# Altium PCB FPv1.3.5.PcbDoc (part 2 of 9)
Units mil, origin at the board's own origin, x right, y up, seen from the top; angles counter-clockwise.
Board outline 3200 x 2100 mil, 4 copper layers (Top Layer, GROUND PLANE, POWER PLANE, Bottom Layer); 98 components, 183 nets, 614 pads, 312 vias.
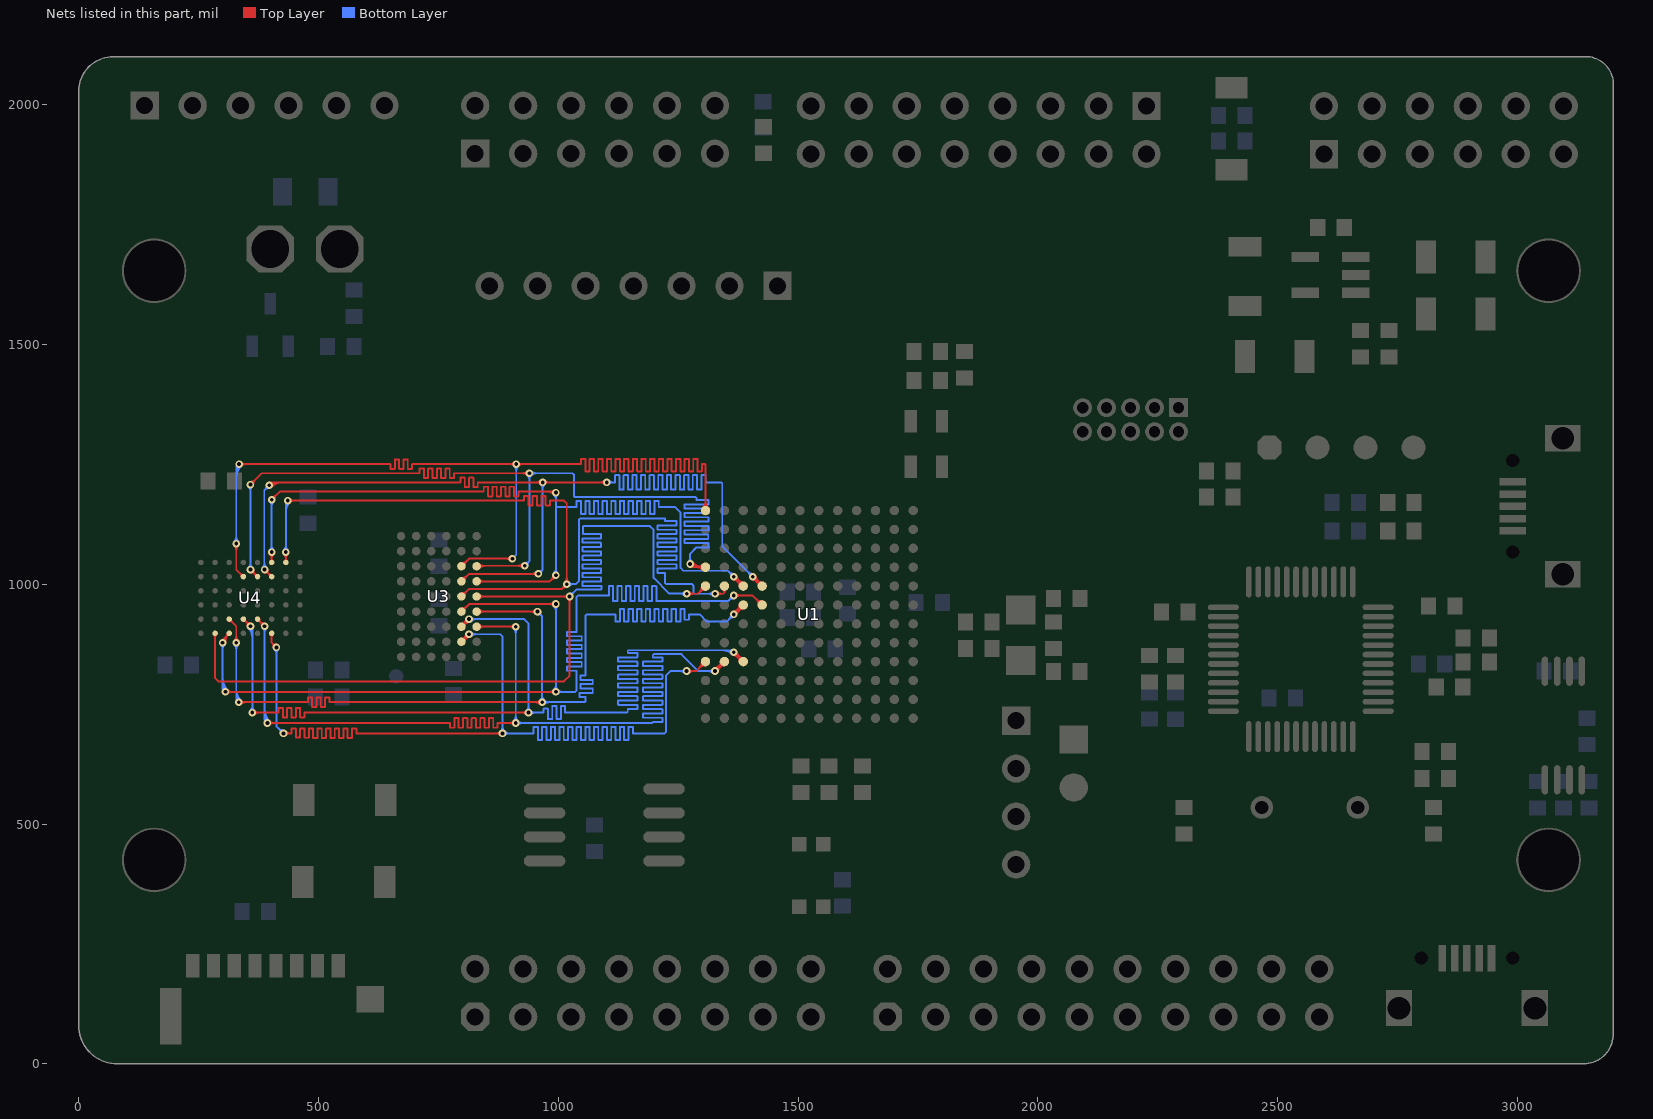
[diagram p4: the nets of this part, all layers, seen from the top]

## Via types
v1: diameter 15.87, hole 7.87, Top Layer to Bottom Layer, tented both sides, 261 vias
v2: diameter 19.8, hole 11.81, Top Layer to Bottom Layer, tented both sides, 25 vias
v3: diameter 23.62, hole 15.75, Top Layer to Bottom Layer, tented both sides, 11 vias
v4: diameter 20, hole 13, Top Layer to Bottom Layer, tented both sides, 5 vias
v5: diameter 27.68, hole 15.75, Top Layer to Bottom Layer, tented both sides, 3 vias
v6: diameter 23.74, hole 15.75, Top Layer to Bottom Layer, tented both sides, 2 vias
v7: diameter 19.8, hole 9.84, Top Layer to Bottom Layer, tented both sides, 2 vias
v8: diameter 23.62, hole 9.45, Top Layer to Bottom Layer, tented both sides, 1 vias
v9: diameter 17.24, hole 9.06, Top Layer to Bottom Layer, tented both sides, 1 vias
v10: diameter 23.74, hole 11.81, Top Layer to Bottom Layer, tented both sides, 1 vias

## Nets (pads, with @x,y where several pads share a name; then routed paths per layer and width w, separated by ;. In a path a pad name is that pad's centre, name@x,y a point inside that pad or via, vN(x,y) a via of type N, cw(c..) or ccw(c..) an arc to the next point about the centre after c; other vN are vias at no path point) (continued)
AD2: U1.A4 U3.H5 U4.C6 | length 2782.5
  Top Layer w4: U4.C6@399.94,895.02 cw(c393.61,888.68) 402.56,888.68 cw(c411.51,888.68) U4.C6@405.18,895.02 ; U4.C6@402.56,897.64 402.56,877.95 ; v1@406.45,868.25 ccw(c393.15,868.54) 402.56,877.95 ; v1@412.26,874.06 cw(c411.97,887.36) 402.56,877.95 ; v1(412.39,868.12) 402.56,877.95 ; v1(427.17,688.98) 443.12,688.98 ccw(c443.12,689.88) 444.02,689.88 444.02,698.08 cw(c444.92,698.08) 444.92,698.98 452.12,698.98 cw(c452.12,698.08) 453.02,698.08 453.02,681.48 ccw(c453.92,681.48) 453.92,680.58 461.12,680.58 ccw(c461.12,681.48) 462.02,681.48 462.02,698.08 cw(c462.92,698.08) 462.92,698.98 470.12,698.98 cw(c470.12,698.08) 471.02,698.08 471.02,680.72 ccw(c471.92,680.72) 471.92,679.82 479.12,679.82 ccw(c479.12,680.72) 480.02,680.72 480.02,698.08 cw(c480.92,698.08) 480.92,698.98 488.12,698.98 cw(c488.12,698.08) 489.02,698.08 489.02,679.88 ccw(c489.92,679.88) 489.92,678.98 497.12,678.98 ccw(c497.12,679.88) 498.02,679.88 498.02,698.08 cw(c498.92,698.08) 498.92,698.98 506.12,698.98 cw(c506.12,698.08) 507.02,698.08 507.02,679.88 ccw(c507.92,679.88) 507.92,678.98 515.12,678.98 ccw(c515.12,679.88) 516.02,679.88 516.02,698.08 cw(c516.92,698.08) 516.92,698.98 524.12,698.98 cw(c524.12,698.08) 525.02,698.08 525.02,679.88 ccw(c525.92,679.88) 525.92,678.98 533.12,678.98 ccw(c533.12,679.88) 534.02,679.88 534.02,698.08 cw(c534.92,698.08) 534.92,698.98 542.12,698.98 cw(c542.12,698.08) 543.02,698.08 543.02,679.88 ccw(c543.92,679.88) 543.92,678.98 551.12,678.98 ccw(c551.12,679.88) 552.02,679.88 552.02,698.08 cw(c552.92,698.08) 552.92,698.98 560.12,698.98 cw(c560.12,698.08) 561.02,698.08 561.02,679.88 ccw(c561.92,679.88) 561.92,678.98 569.12,678.98 ccw(c569.12,679.88) 570.02,679.88 570.02,698.08 cw(c570.92,698.08) 570.92,698.98 578.12,698.98 cw(c578.12,698.08) 579.02,698.08 579.02,689.88 ccw(c579.92,689.88) 579.92,688.98 v1(883.86,688.98) ; v1@431.36,684.78 cw(c441.5,674.64) 441.5,688.98 cw(c441.5,703.31) v1@431.36,693.17 ; U3.H5@798.23,879.92 v1(813.98,895.67) ; U3.H5@798.23,886.78 ccw(c798.23,903.34) 809.94,891.63 ccw(c821.64,879.92) U3.H5@805.09,879.92 ; U3.H5@801.77,886.92 ccw(c795.36,898.02) v1@808.09,896.41 ; U3.H5@805.22,883.47 cw(c816.33,877.05) v1@814.72,889.78 ; 805.39,889.01 cw(c810.04,880.97) v1@812.44,889.93 ; 807.31,887.09 ccw(c799.27,891.73) v1@808.24,894.13 ; v1@808.04,895.67 cw(c793.71,895.67) 803.84,885.53 cw(c813.98,875.4) v1@813.98,889.73 ; v1@879.66,684.78 ccw(c869.53,674.64) 869.53,688.98 ccw(c869.53,703.31) v1@879.66,693.17 ; v1(1267.72,818.9) 1287.4,818.9 U1.A4@1307.09,838.58 ; v1@1271.91,814.7 cw(c1282.04,804.57) 1282.04,818.9 cw(c1282.04,833.22) v1@1271.91,823.09 ; U1.A4@1299.24,838.58 cw(c1280.31,838.58) 1293.7,825.19 cw(c1307.09,811.81) U1.A4@1307.09,830.74
  Bottom Layer w4: v1@408.19,863.92 cw(c398.06,853.79) 412.39,853.79 cw(c426.72,853.79) v1@416.59,863.92 ; v1(412.39,868.12) 412.39,703.75 v1(427.17,688.98) ; v1@421.23,688.98 ccw(c406.9,688.98) 417.03,699.11 ccw(c427.17,709.25) v1@427.17,694.91 ; v1(813.98,895.67) 878.94,895.67 883.86,890.75 v1(883.86,688.98) 948.5,688.98 948.5,702.18 cw(c948.95,702.18) 948.95,702.63 957.05,702.63 cw(c957.05,702.18) 957.5,702.18 957.5,675.77 ccw(c957.95,675.77) 957.95,675.32 966.05,675.32 ccw(c966.05,675.77) 966.5,675.77 966.5,702.18 cw(c966.95,702.18) 966.95,702.63 975.05,702.63 cw(c975.05,702.18) 975.5,702.18 975.5,675.77 ccw(c975.95,675.77) 975.95,675.32 984.05,675.32 ccw(c984.05,675.77) 984.5,675.77 984.5,702.18 cw(c984.95,702.18) 984.95,702.63 993.05,702.63 cw(c993.05,702.18) 993.5,702.18 993.5,675.77 ccw(c993.95,675.77) 993.95,675.32 1002.05,675.32 ccw(c1002.05,675.77) 1002.5,675.77 1002.5,702.18 cw(c1002.95,702.18) 1002.95,702.63 1011.05,702.63 cw(c1011.05,702.18) 1011.5,702.18 1011.5,675.77 ccw(c1011.95,675.77) 1011.95,675.32 1020.05,675.32 ccw(c1020.05,675.77) 1020.5,675.77 1020.5,702.18 cw(c1020.95,702.18) 1020.95,702.63 1029.05,702.63 cw(c1029.05,702.18) 1029.5,702.18 1029.5,675.77 ccw(c1029.95,675.77) 1029.95,675.32 1038.05,675.32 ccw(c1038.05,675.77) 1038.5,675.77 1038.5,702.18 cw(c1038.95,702.18) 1038.95,702.63 1047.05,702.63 cw(c1047.05,702.18) 1047.5,702.18 1047.5,675.77 ccw(c1047.95,675.77) 1047.95,675.32 1056.05,675.32 ccw(c1056.05,675.77) 1056.5,675.77 1056.5,702.18 cw(c1056.95,702.18) 1056.95,702.63 1065.05,702.63 cw(c1065.05,702.18) 1065.5,702.18 1065.5,675.77 ccw(c1065.95,675.77) 1065.95,675.32 1074.05,675.32 ccw(c1074.05,675.77) 1074.5,675.77 1074.5,702.18 cw(c1074.95,702.18) 1074.95,702.63 1083.05,702.63 cw(c1083.05,702.18) 1083.5,702.18 1083.5,675.77 ccw(c1083.95,675.77) 1083.95,675.32 1092.05,675.32 ccw(c1092.05,675.77) 1092.5,675.77 1092.5,702.18 cw(c1092.95,702.18) 1092.95,702.63 1101.05,702.63 cw(c1101.05,702.18) 1101.5,702.18 1101.5,675.77 ccw(c1101.95,675.77) 1101.95,675.32 1110.05,675.32 ccw(c1110.05,675.77) 1110.5,675.77 1110.5,702.18 cw(c1110.95,702.18) 1110.95,702.63 1119.05,702.63 cw(c1119.05,702.18) 1119.5,702.18 1119.5,675.77 ccw(c1119.95,675.77) 1119.95,675.32 1128.05,675.32 ccw(c1128.05,675.77) 1128.5,675.77 1128.5,702.18 cw(c1128.95,702.18) 1128.95,702.63 1137.05,702.63 cw(c1137.05,702.18) 1137.5,702.18 1137.5,675.77 ccw(c1137.95,675.77) 1137.95,675.32 1146.05,675.32 ccw(c1146.05,675.77) 1146.5,675.77 1146.5,702.18 cw(c1146.95,702.18) 1146.95,702.63 1155.05,702.63 cw(c1155.05,702.18) 1155.5,702.18 1155.5,688.98 1222,688.98 1225,691.98 1225,810 1233.9,818.9 v1(1267.72,818.9) ; v1@818.17,891.47 cw(c828.31,881.34) 828.31,895.67 cw(c828.31,910) v1@818.17,899.87 ; v1@879.66,693.17 ccw(c869.53,703.31) 883.86,703.31 ccw(c898.19,703.31) 888.06,693.17 ccw(c898.19,703.31) 898.19,688.98 ccw(c898.19,674.64) v1@888.06,684.78 ; v1@1263.52,814.7 ccw(c1253.39,804.57) 1253.39,818.9 ccw(c1253.39,833.22) v1@1263.52,823.09
AD3: U1.B4 U3.G6 U4.D5 | length 2869
  Top Layer w4: U4.D5@373.03,923.46 cw(c373.03,914.5) 379.36,920.83 cw(c385.69,927.17) U4.D5@376.74,927.17 ; U4.D5@373.03,927.17 v1(387.8,912.4) ; v1@381.86,912.4 ccw(c367.52,912.4) 377.66,922.54 ccw(c387.8,932.67) v1@387.8,918.34 ; v1(393.7,710.63) 773.62,710.63 cw(c773.62,709.8) 774.45,709.8 774.45,701.53 ccw(c775.35,701.53) 775.35,700.63 782.55,700.63 ccw(c782.55,701.53) 783.45,701.53 783.45,719.73 cw(c784.35,719.73) 784.35,720.63 791.55,720.63 cw(c791.55,719.73) 792.45,719.73 792.45,701.53 ccw(c793.35,701.53) 793.35,700.63 800.55,700.63 ccw(c800.55,701.53) 801.45,701.53 801.45,719.73 cw(c802.35,719.73) 802.35,720.63 809.55,720.63 cw(c809.55,719.73) 810.45,719.73 810.45,701.53 ccw(c811.35,701.53) 811.35,700.63 818.55,700.63 ccw(c818.55,701.53) 819.45,701.53 819.45,719.73 cw(c820.35,719.73) 820.35,720.63 827.55,720.63 cw(c827.55,719.73) 828.45,719.73 828.45,701.53 ccw(c829.35,701.53) 829.35,700.63 836.55,700.63 ccw(c836.55,701.53) 837.45,701.53 837.45,719.73 cw(c838.35,719.73) 838.35,720.63 845.55,720.63 cw(c845.55,719.73) 846.45,719.73 846.45,701.53 ccw(c847.35,701.53) 847.35,700.63 854.55,700.63 ccw(c854.55,701.53) 855.45,701.53 855.45,719.73 cw(c856.35,719.73) 856.35,720.63 863.55,720.63 cw(c863.55,719.73) 864.45,719.73 864.45,701.53 ccw(c865.35,701.53) 865.35,700.63 872.55,700.63 ccw(c872.55,701.53) 873.45,701.53 873.45,709.73 cw(c874.35,709.73) 874.35,710.63 v1(911.42,710.63) ; v1@397.9,706.43 cw(c408.03,696.3) 408.03,710.63 cw(c408.03,724.96) v1@397.9,714.83 ; U3.G6@829.72,911.42 v1(911.42,911.42) ; U3.G6@834.57,906.57 cw(c846.28,894.86) 846.28,911.42 cw(c846.28,927.97) U3.G6@834.57,916.27 ; v1@907.22,706.43 ccw(c897.08,696.3) 897.08,710.63 ccw(c897.08,724.96) v1@907.22,714.83 ; v1@907.22,907.22 ccw(c897.08,897.08) 897.08,911.42 ccw(c897.08,925.75) v1@907.22,915.62 ; v1@1325.27,824.64 ccw(c1319.74,845.74) U1.B4@1338.63,834.83 ; v1@1326.28,820.77 ccw(c1323.15,832.71) 1333.84,826.54 ; v1(1326.77,818.9) U1.B4@1346.46,838.58 ; v1@1326.77,824.83 ccw(c1326.77,839.15) 1336.9,829.03 ccw(c1347.03,818.9) v1@1332.7,818.9 ; v1@1328.64,818.41 cw(c1340.58,815.28) 1334.41,825.97 ; v1@1328.74,824.5 ccw(c1330.12,828.43) 1333.73,826.35 ; v1@1332.37,820.86 cw(c1336.31,822.25) 1334.22,825.86 ; v1@1332.51,817.39 cw(c1353.62,811.86) U1.B4@1342.71,830.76 ; U1.B4@1338.61,838.58 cw(c1319.68,838.58) 1333.07,825.19 cw(c1346.46,811.81) U1.B4@1346.46,830.74 ; v1@1328.31,824.63 ccw(c1329.98,830.86) 1333.2,825.27 cw(c1329.98,830.86) v1@1328.31,824.63 ; v1@1332.5,820.43 cw(c1338.74,822.1) 1333.15,825.33 ccw(c1338.74,822.1) v1@1332.5,820.43
  Bottom Layer w4: v1@383.6,908.2 cw(c373.46,898.07) 387.8,898.07 cw(c402.13,898.07) v1@391.99,908.2 ; 387.8,719.91 ccw(c402.98,719.91) v1@392.24,709.17 ; 387.8,729.56 ccw(c412.63,729.56) v1@395.07,712 ; 387.8,739.22 ccw(c422.29,739.22) v1@397.9,714.83 ; v1(387.8,912.4) 387.8,716.54 v1(393.7,710.63) ; v1@907.22,714.83 ccw(c897.08,724.96) 911.42,724.96 ccw(c925.75,724.96) 915.62,714.83 ccw(c925.75,724.96) 925.75,710.63 ccw(c925.75,696.3) v1@915.62,706.43 ; v1@907.22,907.22 cw(c897.08,897.08) 911.42,897.08 cw(c925.75,897.08) v1@915.62,907.22 ; v1(911.42,911.42) v1(911.42,710.63) 1195.63,710.63 1197,712 1197,712.5 1216.55,712.5 ccw(c1216.55,712.95) 1217,712.95 1217,721.05 ccw(c1216.55,721.05) 1216.55,721.5 1177.45,721.5 cw(c1177.45,721.95) 1177,721.95 1177,730.05 cw(c1177.45,730.05) 1177.45,730.5 1216.55,730.5 ccw(c1216.55,730.95) 1217,730.95 1217,739.05 ccw(c1216.55,739.05) 1216.55,739.5 1177.45,739.5 cw(c1177.45,739.95) 1177,739.95 1177,748.05 cw(c1177.45,748.05) 1177.45,748.5 1216.55,748.5 ccw(c1216.55,748.95) 1217,748.95 1217,757.05 ccw(c1216.55,757.05) 1216.55,757.5 1177.45,757.5 cw(c1177.45,757.95) 1177,757.95 1177,766.05 cw(c1177.45,766.05) 1177.45,766.5 1216.55,766.5 ccw(c1216.55,766.95) 1217,766.95 1217,775.05 ccw(c1216.55,775.05) 1216.55,775.5 1177.45,775.5 cw(c1177.45,775.95) 1177,775.95 1177,784.05 cw(c1177.45,784.05) 1177.45,784.5 1216.55,784.5 ccw(c1216.55,784.95) 1217,784.95 1217,793.05 ccw(c1216.55,793.05) 1216.55,793.5 1177.45,793.5 cw(c1177.45,793.95) 1177,793.95 1177,802.05 cw(c1177.45,802.05) 1177.45,802.5 1216.55,802.5 ccw(c1216.55,802.95) 1217,802.95 1217,811.05 ccw(c1216.55,811.05) 1216.55,811.5 1177.45,811.5 cw(c1177.45,811.95) 1177,811.95 1177,820.05 cw(c1177.45,820.05) 1177.45,820.5 1216.55,820.5 ccw(c1216.55,820.95) 1217,820.95 1217,829.05 ccw(c1216.55,829.05) 1216.55,829.5 1177.45,829.5 cw(c1177.45,829.95) 1177,829.95 1177,838.05 cw(c1177.45,838.05) 1177.45,838.5 1216.55,838.5 ccw(c1216.55,838.95) 1217,838.95 1217,847.05 ccw(c1216.55,847.05) 1216.55,847.5 1197,847.5 1197,852 1199.33,854.33 1256.67,854.33 1292.1,818.9 v1(1326.77,818.9) ; v1@1322.58,814.7 ccw(c1312.45,804.57) 1312.45,818.9 ccw(c1312.45,833.22) v1@1322.58,823.09
AD4: U1.C4 U3.G5 U4.E5 | length 2923.1
  Top Layer w4: U4.E5@343.5,923.46 cw(c343.5,914.5) 349.83,920.83 cw(c356.17,927.17) U4.E5@347.21,927.17 ; U4.E5@343.5,927.17 v1(358.27,912.4) ; v1@352.33,912.4 ccw(c338,912.4) 348.13,922.54 ccw(c358.27,932.67) v1@358.27,918.34 ; v1(362.2,732.28) 416,732.28 ccw(c416,733.18) 416.9,733.18 416.9,741.38 cw(c417.8,741.38) 417.8,742.28 425,742.28 cw(c425,741.38) 425.9,741.38 425.9,723.18 ccw(c426.8,723.18) 426.8,722.28 434,722.28 ccw(c434,723.18) 434.9,723.18 434.9,741.38 cw(c435.8,741.38) 435.8,742.28 443,742.28 cw(c443,741.38) 443.9,741.38 443.9,723.18 ccw(c444.8,723.18) 444.8,722.28 452,722.28 ccw(c452,723.18) 452.9,723.18 452.9,741.38 cw(c453.8,741.38) 453.8,742.28 461,742.28 cw(c461,741.38) 461.9,741.38 461.9,723.18 ccw(c462.8,723.18) 462.8,722.28 470,722.28 ccw(c470,723.18) 470.9,723.18 470.9,732.28 v1(937.99,732.28) ; v1@366.4,728.09 cw(c376.54,717.95) 376.54,732.28 cw(c376.54,746.62) v1@366.4,736.48 ; U3.G5@798.23,911.42 v1(813.98,927.17) ; U3.G5@798.23,918.28 ccw(c798.23,934.83) v1@809.94,923.13 ; U3.G5@801.77,918.41 ccw(c795.36,929.52) v1@808.09,927.91 ; U3.G5@805.09,911.42 cw(c821.64,911.42) v1@809.94,923.12 ; U3.G5@805.22,914.96 cw(c816.33,908.55) v1@814.72,921.28 ; 805.39,920.5 cw(c810.04,912.46) v1@812.44,921.43 ; 807.31,918.58 ccw(c799.27,923.23) v1@808.24,925.63 ; v1@808.04,927.17 cw(c793.71,927.17) 803.84,917.03 cw(c813.98,906.9) v1@813.98,921.23 ; v1@933.79,728.09 ccw(c923.66,717.95) 923.66,732.28 ccw(c923.66,746.62) v1@933.79,736.48 ; v1@1364.64,852.53 cw(c1359.11,831.42) U1.C4@1378,842.33 ; v1@1365.65,856.4 cw(c1362.52,844.46) 1373.21,850.63 ; v1@1366.14,852.33 cw(c1366.14,838.01) 1376.27,848.14 cw(c1386.4,858.27) v1@1372.07,858.27 ; v1(1366.14,858.27) U1.C4@1385.83,838.58 ; v1@1368.01,858.76 ccw(c1379.95,861.89) 1373.78,851.2 ; v1@1368.11,852.67 cw(c1369.49,848.73) 1373.1,850.82 ; v1@1371.74,856.3 ccw(c1375.68,854.92) 1373.59,851.31 ; v1@1371.88,859.77 ccw(c1392.99,865.3) U1.C4@1382.08,846.41 ; U1.C4@1377.98,838.58 ccw(c1359.05,838.58) 1372.44,851.97 ccw(c1385.83,865.36) U1.C4@1385.83,846.43 ; v1@1367.68,852.54 cw(c1369.35,846.3) 1372.58,851.89 ccw(c1369.35,846.3) v1@1367.68,852.54 ; v1@1371.87,856.73 ccw(c1378.11,855.06) 1372.52,851.83 cw(c1378.11,855.06) v1@1371.87,856.73
  Bottom Layer w4: v1@354.07,908.2 cw(c334.43,888.56) 362.2,888.56 ; v1@356.9,911.03 cw(c344.09,898.22) 362.2,898.22 ; v1@358.01,736.48 ccw(c347.87,746.62) 362.2,746.62 ccw(c376.54,746.62) v1@366.4,736.48 ; v1(358.27,912.4) 362.2,908.46 v1(362.2,732.28) ; v1(813.98,927.17) 929.13,927.17 937.99,918.31 v1(937.99,732.28) 969.5,732.28 969.5,739.96 cw(c969.95,739.96) 969.95,740.41 978.05,740.41 cw(c978.05,739.96) 978.5,739.96 978.5,719.08 ccw(c978.95,719.08) 978.95,718.63 987.05,718.63 ccw(c987.05,719.08) 987.5,719.08 987.5,745.49 cw(c987.95,745.49) 987.95,745.94 996.05,745.94 cw(c996.05,745.49) 996.5,745.49 996.5,719.08 ccw(c996.95,719.08) 996.95,718.63 1005.05,718.63 ccw(c1005.05,719.08) 1005.5,719.08 1005.5,745.49 cw(c1005.95,745.49) 1005.95,745.94 1014.05,745.94 cw(c1014.05,745.49) 1014.5,745.49 1014.5,732.28 1143.28,732.28 1145,734 1145,739.5 1164.55,739.5 ccw(c1164.55,739.95) 1165,739.95 1165,748.05 ccw(c1164.55,748.05) 1164.55,748.5 1125.45,748.5 cw(c1125.45,748.95) 1125,748.95 1125,757.05 cw(c1125.45,757.05) 1125.45,757.5 1164.55,757.5 ccw(c1164.55,757.95) 1165,757.95 1165,766.05 ccw(c1164.55,766.05) 1164.55,766.5 1125.45,766.5 cw(c1125.45,766.95) 1125,766.95 1125,775.05 cw(c1125.45,775.05) 1125.45,775.5 1164.55,775.5 ccw(c1164.55,775.95) 1165,775.95 1165,784.05 ccw(c1164.55,784.05) 1164.55,784.5 1125.45,784.5 cw(c1125.45,784.95) 1125,784.95 1125,793.05 cw(c1125.45,793.05) 1125.45,793.5 1164.55,793.5 ccw(c1164.55,793.95) 1165,793.95 1165,802.05 ccw(c1164.55,802.05) 1164.55,802.5 1125.45,802.5 cw(c1125.45,802.95) 1125,802.95 1125,811.05 cw(c1125.45,811.05) 1125.45,811.5 1164.55,811.5 ccw(c1164.55,811.95) 1165,811.95 1165,820.05 ccw(c1164.55,820.05) 1164.55,820.5 1125.45,820.5 cw(c1125.45,820.95) 1125,820.95 1125,829.05 cw(c1125.45,829.05) 1125.45,829.5 1164.55,829.5 ccw(c1164.55,829.95) 1165,829.95 1165,838.05 ccw(c1164.55,838.05) 1164.55,838.5 1125.45,838.5 cw(c1125.45,838.95) 1125,838.95 1125,847.05 cw(c1125.45,847.05) 1125.45,847.5 1164.55,847.5 ccw(c1164.55,847.95) 1165,847.95 1165,856.05 ccw(c1164.55,856.05) 1164.55,856.5 1145,856.5 1145,861 1146.33,862.33 1362.08,862.33 v1(1366.14,858.27) ; v1@818.17,922.97 cw(c828.31,912.83) 828.31,927.17 cw(c828.31,941.5) v1@818.17,931.36 ; v1@933.79,736.48 ccw(c923.66,746.62) 937.99,746.62 ccw(c952.33,746.62) 942.19,736.48 ccw(c952.32,746.62) 952.32,732.28 ; v1@942.19,728.09 cw(c952.33,717.95) 952.33,732.28 ; 1342.01,862.33 cw(c1342.01,834.14) v1@1361.95,854.07 ; 1351.67,862.33 cw(c1351.67,843.79) v1@1364.77,856.9
AD5: U1.C7 U3.F6 U4.F5 | length 2855.7
  Top Layer w4: U4.F5@313.98,923.46 cw(c313.98,914.5) 320.31,920.83 cw(c326.64,927.17) U4.F5@317.68,927.17 ; U4.F5@313.98,927.17 328.74,912.4 v1(328.74,877.95) ; v1@324.54,882.15 ccw(c314.41,892.29) 328.74,892.29 ccw(c343.07,892.29) v1@332.94,882.15 ; v1(333.66,753.94) 477.03,753.94 ccw(c477.03,754.84) 477.93,754.84 477.93,763.04 cw(c478.83,763.04) 478.83,763.94 486.03,763.94 cw(c486.03,763.04) 486.93,763.04 486.93,744.84 ccw(c487.83,744.84) 487.83,743.94 495.03,743.94 ccw(c495.03,744.84) 495.93,744.84 495.93,763.04 cw(c496.83,763.04) 496.83,763.94 504.03,763.94 cw(c504.03,763.04) 504.93,763.04 504.93,744.84 ccw(c505.83,744.84) 505.83,743.94 513.03,743.94 ccw(c513.03,744.84) 513.93,744.84 513.93,763.04 cw(c514.83,763.04) 514.83,763.94 522.03,763.94 cw(c522.03,763.04) 522.93,763.04 522.93,754.84 ccw(c523.83,754.84) 523.83,753.94 v1(966.54,753.94) ; v1@337.86,749.74 cw(c347.99,739.6) 347.99,753.94 cw(c347.99,768.27) v1@337.86,758.13 ; U3.F6@829.72,942.91 v1(956.69,942.91) ; U3.F6@834.57,938.06 cw(c846.28,926.36) 846.28,942.91 cw(c846.28,959.47) U3.F6@834.57,947.76 ; v1@952.49,938.72 ccw(c942.36,928.58) 942.36,942.91 ccw(c942.36,957.25) v1@952.49,947.11 ; v1@962.34,749.74 ccw(c952.2,739.6) 952.2,753.94 ccw(c952.2,768.27) v1@962.34,758.13 ; v1@1364.64,942.75 ccw(c1359.11,963.85) U1.C7@1378,952.94 ; v1@1365.65,938.88 ccw(c1362.52,950.82) 1373.21,944.65 ; v1(1366.14,937.01) U1.C7@1385.83,956.69 ; v1@1366.14,942.94 ccw(c1366.14,957.26) 1376.27,947.14 ccw(c1386.4,937.01) v1@1372.07,937.01 ; v1@1368.01,936.52 cw(c1379.95,933.39) 1373.78,944.08 ; v1@1368.11,942.61 ccw(c1369.49,946.54) 1373.1,944.46 ; v1@1371.74,938.97 cw(c1375.68,940.36) 1373.59,943.97 ; v1@1371.88,935.5 cw(c1392.99,929.97) U1.C7@1382.08,948.87 ; U1.C7@1377.98,956.69 cw(c1359.05,956.69) 1372.44,943.3 cw(c1385.83,929.92) U1.C7@1385.83,948.85 ; v1@1367.68,942.74 ccw(c1369.35,948.97) 1372.57,943.38 cw(c1369.35,948.97) v1@1367.68,942.74 ; v1@1371.87,938.54 cw(c1378.11,940.21) 1372.52,943.44 ccw(c1378.11,940.21) v1@1371.87,938.54
  Bottom Layer w4: v1@324.54,873.75 cw(c314.41,863.62) 328.74,863.62 cw(c343.07,863.62) v1@332.94,873.75 ; 328.74,760.84 ccw(c340.56,760.84) v1@332.2,752.48 ; 328.74,770.49 ccw(c350.22,770.49) v1@335.03,755.31 ; 328.74,780.15 ccw(c359.88,780.15) v1@337.86,758.13 ; v1(328.74,877.95) 328.74,758.86 v1(333.66,753.94) ; v1(956.69,942.91) 966.54,933.07 ; v1@956.82,936.98 cw(c957.1,923.63) 966.53,933.07 ; v1@962.34,758.13 ccw(c952.2,768.27) 966.54,768.27 ccw(c980.87,768.27) 970.73,758.13 ccw(c980.87,768.27) 980.87,753.94 ccw(c980.87,739.6) v1@970.73,749.74 ; v1@962.63,942.79 ccw(c975.97,942.51) 966.53,933.07 ; v1@1360.21,937.01 cw(c1345.89,937.01) 1356.01,926.88 cw(c1366.14,916.75) v1@1366.14,931.07 ; v1(1366.14,937.01) 1351.13,922 1310,922 1295,937 1272.5,937 1272.5,925.93 1263.5,925.93 1263.5,948.69 1254.5,948.69 1254.5,922 1245.5,922 1245.5,948.69 1236.5,948.69 1236.5,922 1227.5,922 1227.5,948.69 1218.5,948.69 1218.5,922 1209.5,922 1209.5,948.69 1200.5,948.69 1200.5,922 1191.5,922 1191.5,948.69 1182.5,948.69 1182.5,922 1173.5,922 1173.5,948.69 1164.5,948.69 1164.5,922 1155.5,922 1155.5,948.69 1146.5,948.69 1146.5,922 1137.5,922 1137.5,948.69 1128.5,948.69 1128.5,922 1119.5,922 1119.5,937 1059,937 1057,935 1057,809.5 1046.83,809.5 ccw(c1046.83,809.05) 1046.38,809.05 1046.38,800.95 ccw(c1046.83,800.95) 1046.83,800.5 1071.55,800.5 cw(c1071.55,800.05) 1072,800.05 1072,791.95 cw(c1071.55,791.95) 1071.55,791.5 1046.83,791.5 ccw(c1046.83,791.05) 1046.38,791.05 1046.38,782.95 ccw(c1046.83,782.95) 1046.83,782.5 1071.55,782.5 cw(c1071.55,782.05) 1072,782.05 1072,773.95 cw(c1071.55,773.95) 1071.55,773.5 1044.8,773.5 ccw(c1044.8,773.05) 1044.35,773.05 1044.35,764.95 ccw(c1044.8,764.95) 1044.8,764.5 1057,764.5 1057,756 1054.94,753.94 v1(966.54,753.94) 966.54,933.07
AD6: U1.D7 U3.F5 U4.F6 | length 2854.5
  Top Layer w4: v1(300.2,877.95) 300.2,883.86 U4.F6@313.98,897.64 ccw(c332.93,878.69) v1@306.13,878.09 ; v1@302.13,878 cw(c319.98,878.4) 307.36,891.02 ; v1(306.1,775.59) v1(995.08,775.59) ; U4.F6@310.27,897.64 cw(c301.31,897.64) 307.65,891.31 cw(c313.98,884.98) U4.F6@313.98,893.93 ; v1@310.3,771.39 cw(c320.44,761.26) 320.44,775.59 cw(c320.44,789.92) v1@310.3,779.79 ; U3.F5@798.23,942.91 813.98,958.66 v1(995.08,958.66) ; U3.F5@798.23,949.77 ccw(c798.23,966.33) 809.94,954.62 ccw(c821.64,942.91) U3.F5@805.09,942.91 ; v1@990.88,771.39 ccw(c980.75,761.26) 980.75,775.59 ccw(c980.75,789.92) v1@990.88,779.79 ; v1@990.88,954.47 ccw(c980.76,944.34) 980.76,958.66 ccw(c980.76,972.98) v1@990.88,962.86 ; v1(1366.14,976.38) 1405.51,976.38 U1.D7@1425.2,956.69 ; v1@1370.34,972.18 cw(c1380.47,962.05) 1380.47,976.38 cw(c1380.47,990.7) v1@1370.34,980.57 ; U1.D7@1417.35,956.69 ccw(c1398.42,956.69) 1411.81,970.08 ccw(c1425.2,983.47) U1.D7@1425.2,964.54
  Bottom Layer w4: v1@296,873.75 cw(c285.86,863.62) 300.2,863.62 cw(c314.53,863.62) v1@304.39,873.75 ; 300.2,784.87 ccw(c315.38,784.87) v1@304.64,774.13 ; 300.2,794.52 ccw(c325.04,794.52) v1@307.47,776.96 ; 300.2,804.18 ccw(c334.69,804.18) v1@310.3,779.79 ; v1(300.2,877.95) 300.2,781.5 v1(306.1,775.59) ; v1@990.88,779.79 ccw(c980.75,789.92) 995.08,789.92 ccw(c1009.41,789.92) 999.28,779.79 ccw(c1009.41,789.92) 1009.41,775.59 ccw(c1009.41,761.26) v1@999.28,771.39 ; v1@990.88,954.47 cw(c980.76,944.34) 995.08,944.34 cw(c1009.4,944.34) v1@999.27,954.47 ; v1(995.08,958.66) v1(995.08,775.59) 1035.43,775.59 1038.39,778.54 1038.39,819.5 1018.84,819.5 cw(c1018.84,819.95) 1018.39,819.95 1018.39,828.05 cw(c1018.84,828.05) 1018.84,828.5 1048.55,828.5 ccw(c1048.55,828.95) 1049,828.95 1049,837.05 ccw(c1048.55,837.05) 1048.55,837.5 1018.84,837.5 cw(c1018.84,837.95) 1018.39,837.95 1018.39,846.05 cw(c1018.84,846.05) 1018.84,846.5 1048.55,846.5 ccw(c1048.55,846.95) 1049,846.95 1049,855.05 ccw(c1048.55,855.05) 1048.55,855.5 1018.84,855.5 cw(c1018.84,855.95) 1018.39,855.95 1018.39,864.05 cw(c1018.84,864.05) 1018.84,864.5 1048.55,864.5 ccw(c1048.55,864.95) 1049,864.95 1049,873.05 ccw(c1048.55,873.05) 1048.55,873.5 1018.84,873.5 cw(c1018.84,873.95) 1018.39,873.95 1018.39,882.05 cw(c1018.84,882.05) 1018.84,882.5 1048.55,882.5 ccw(c1048.55,882.95) 1049,882.95 1049,891.05 ccw(c1048.55,891.05) 1048.55,891.5 1018.84,891.5 cw(c1018.84,891.95) 1018.39,891.95 1018.39,900.05 cw(c1018.84,900.05) 1018.84,900.5 1038.39,900.5 1038.39,973.39 1041,976 1105.5,976 1105.5,995.55 cw(c1105.95,995.55) 1105.95,996 1114.05,996 cw(c1114.05,995.55) 1114.5,995.55 1114.5,965.14 ccw(c1114.95,965.14) 1114.95,964.69 1123.05,964.69 ccw(c1123.05,965.14) 1123.5,965.14 1123.5,995.55 cw(c1123.95,995.55) 1123.95,996 1132.05,996 cw(c1132.05,995.55) 1132.5,995.55 1132.5,965.14 ccw(c1132.95,965.14) 1132.95,964.69 1141.05,964.69 ccw(c1141.05,965.14) 1141.5,965.14 1141.5,995.55 cw(c1141.95,995.55) 1141.95,996 1150.05,996 cw(c1150.05,995.55) 1150.5,995.55 1150.5,965.14 ccw(c1150.95,965.14) 1150.95,964.69 1159.05,964.69 ccw(c1159.05,965.14) 1159.5,965.14 1159.5,995.55 cw(c1159.95,995.55) 1159.95,996 1168.05,996 cw(c1168.05,995.55) 1168.5,995.55 1168.5,965.14 ccw(c1168.95,965.14) 1168.95,964.69 1177.05,964.69 ccw(c1177.05,965.14) 1177.5,965.14 1177.5,995.55 cw(c1177.95,995.55) 1177.95,996 1186.05,996 cw(c1186.05,995.55) 1186.5,995.55 1186.5,965.14 ccw(c1186.95,965.14) 1186.95,964.69 1195.05,964.69 ccw(c1195.05,965.14) 1195.5,965.14 1195.5,995.55 cw(c1195.95,995.55) 1195.95,996 1204.05,996 cw(c1204.05,995.55) 1204.5,995.55 1204.5,965.14 ; 1204.95,964.69 cw(c1204.95,965.14) 1204.5,965.14 ; v1@1360.21,976.38 cw(c1345.89,976.38) 1356.01,966.25 cw(c1366.14,956.12) v1@1366.14,970.45 ; v1(1366.14,976.38) 1354.9,965.14 1204.5,965.14
AD7: U1.A8 U3.E6 U4.G6 | length 2453
  Top Layer w4: U4.G6@281.83,895.02 cw(c275.5,888.68) 284.45,888.68 cw(c293.4,888.68) U4.G6@287.07,895.02 ; U4.G6@284.45,897.64 284.45,804.13 291.34,797.24 1011.81,797.24 1023.62,809.06 v1(1023.62,974.41) U3.E6@829.72,974.41 ; U3.E6@834.57,969.56 cw(c846.28,957.85) 846.28,974.41 cw(c846.28,990.97) U3.E6@834.57,979.26 ; v1@1019.43,978.6 cw(c1009.3,988.73) 1009.3,974.41 cw(c1009.3,960.09) 1019.43,970.21 cw(c1009.3,960.09) 1023.62,960.09 cw(c1037.95,960.09) v1@1027.82,970.21 ; v1(1268,980) 1291.02,980 U1.A8@1307.09,996.06 ; v1@1272.2,975.8 cw(c1282.32,965.68) 1282.32,980 cw(c1282.32,994.32) v1@1272.2,984.2 ; U1.A8@1299.24,996.06 cw(c1280.31,996.06) 1293.7,982.68 cw(c1307.09,969.29) U1.A8@1307.09,988.22
  Bottom Layer w4: v1(1023.62,974.41) 1038.21,989 1089,989 1090,990 1090,996 1089.5,996.5 1051.31,996.5 cw(c1051.31,996.95) 1050.86,996.95 1050.86,1005.05 cw(c1051.31,1005.05) 1051.31,1005.5 1088.55,1005.5 ccw(c1088.55,1005.95) 1089,1005.95 1089,1014.05 ccw(c1088.55,1014.05) 1088.55,1014.5 1051.45,1014.5 cw(c1051.45,1014.95) 1051,1014.95 1051,1023.05 cw(c1051.45,1023.05) 1051.45,1023.5 1088.55,1023.5 ccw(c1088.55,1023.95) 1089,1023.95 1089,1032.05 ccw(c1088.55,1032.05) 1088.55,1032.5 1051.45,1032.5 cw(c1051.45,1032.95) 1051,1032.95 1051,1041.05 cw(c1051.45,1041.05) 1051.45,1041.5 1088.55,1041.5 ccw(c1088.55,1041.95) 1089,1041.95 1089,1050.05 ccw(c1088.55,1050.05) 1088.55,1050.5 1051.45,1050.5 cw(c1051.45,1050.95) 1051,1050.95 1051,1059.05 cw(c1051.45,1059.05) 1051.45,1059.5 1088.55,1059.5 ccw(c1088.55,1059.95) 1089,1059.95 1089,1068.05 ccw(c1088.55,1068.05) 1088.55,1068.5 1051.45,1068.5 cw(c1051.45,1068.95) 1051,1068.95 1051,1077.05 cw(c1051.45,1077.05) 1051.45,1077.5 1088.55,1077.5 ccw(c1088.55,1077.95) 1089,1077.95 1089,1086.05 ccw(c1088.55,1086.05) 1088.55,1086.5 1051.45,1086.5 cw(c1051.45,1086.95) 1051,1086.95 1051,1095.05 cw(c1051.45,1095.05) 1051.45,1095.5 1088.55,1095.5 ccw(c1088.55,1095.95) 1089,1095.95 1089,1104.05 ccw(c1088.55,1104.05) 1088.55,1104.5 1052.5,1104.5 1052,1105 1052,1120 1053,1121 1191,1121 1199,1113 1199,1013 1231.72,980.28 1267.72,980.28 v1(1268,980) ; v1@1023.62,980.34 ccw(c1023.62,994.67) 1033.75,984.54 ccw(c1043.88,974.41) v1@1029.55,974.41 ; 1252.99,980.28 cw(c1252.99,964.99) v1@1263.8,975.8 ; 1254.36,980.28 ccw(c1254.36,993.64) v1@1263.8,984.2
AD8: U1.B8 U3.E5 U4.B1 | length 2606.9
  Top Layer w4: v1@427.89,1062.73 cw(c417.75,1052.6) 432.09,1052.6 cw(c446.42,1052.6) v1@436.28,1062.73 ; U4.B1@429.46,1047.9 ccw(c423.13,1054.23) 432.09,1054.23 ccw(c441.04,1054.23) U4.B1@434.71,1047.9 ; U4.B1@432.09,1045.28 v1(432.09,1066.93) ; v1(436.02,1174.21) 927.8,1174.21 ccw(c927.8,1175.11) 928.7,1175.11 928.7,1183.31 cw(c929.6,1183.31) 929.6,1184.21 936.8,1184.21 cw(c936.8,1183.31) 937.7,1183.31 937.7,1165.11 ccw(c938.6,1165.11) 938.6,1164.21 945.8,1164.21 ccw(c945.8,1165.11) 946.7,1165.11 946.7,1183.31 cw(c947.6,1183.31) 947.6,1184.21 954.8,1184.21 cw(c954.8,1183.31) 955.7,1183.31 955.7,1165.11 ccw(c956.6,1165.11) 956.6,1164.21 963.8,1164.21 ccw(c963.8,1165.11) 964.7,1165.11 964.7,1183.31 cw(c965.6,1183.31) 965.6,1184.21 972.8,1184.21 cw(c972.8,1183.31) 973.7,1183.31 973.7,1165.11 ccw(c974.6,1165.11) 974.6,1164.21 981.8,1164.21 ccw(c981.8,1165.11) 982.7,1165.11 982.7,1173.31 cw(c983.6,1173.31) 983.6,1174.21 1011.81,1174.21 1017.72,1168.31 v1(1017.72,1000) 1007.87,990.16 ; v1@440.22,1170.02 cw(c450.35,1159.89) 450.35,1174.21 cw(c450.35,1188.54) v1@440.22,1178.41 ; U3.E5@798.23,974.41 813.98,990.16 1007.87,990.16 ; U3.E5@798.23,981.27 ccw(c798.23,997.82) 809.94,986.12 ccw(c821.64,974.41) U3.E5@805.09,974.41 ; v1@1011.78,999.88 cw(c998.43,999.6) 1007.87,990.16 ; v1@1013.52,1004.2 ccw(c1003.39,1014.32) 1017.72,1014.32 ccw(c1032.04,1014.32) v1@1021.91,1004.2 ; v1@1017.6,994.07 ccw(c1017.32,980.71) 1007.87,990.16 ; v1(1327,980) 1344,980 1346.46,982.46 ; v1@1331.2,975.8 cw(c1341.32,965.68) 1341.32,980 cw(c1341.32,994.32) v1@1331.2,984.2 ; U1.B8@1342.53,989.28 cw(c1338.58,982.46) 1346.46,982.46 ; U1.B8@1346.46,996.06 1346.46,982.46 ; U1.B8@1350.39,989.28 ccw(c1354.34,982.46) 1346.46,982.46
  Bottom Layer w4: v1@427.89,1071.13 ccw(c417.75,1081.26) 432.09,1081.26 ccw(c446.42,1081.26) v1@436.28,1071.13 ; v1(432.09,1066.93) 432.09,1170.28 v1(436.02,1174.21) ; 432.09,1150.38 cw(c459.85,1150.38) v1@440.22,1170.02 ; 432.09,1160.04 cw(c450.2,1160.04) v1@437.39,1172.85 ; v1(1017.72,1000) 1036.42,1000 1043,1006.58 1043,1134 1046.34,1137.34 1221.66,1137.34 1223,1136 1223,1131.5 1247,1131.5 1247,1122.5 1206.98,1122.5 1206.98,1113.5 1247,1113.5 1247,1104.5 1207,1104.5 1207,1095.5 1247,1095.5 1247,1086.5 1207,1086.5 1207,1077.5 1247,1077.5 1247,1068.5 1207,1068.5 1207,1059.5 1247,1059.5 1247,1050.5 1207,1050.5 1207,1041.5 1247,1041.5 1247,1032.5 1207,1032.5 1207,1023.5 1223,1023.5 1223,1002 1225,1000 1279,1000 1281.93,997.07 1281.93,982.07 1284,980 1291.09,980 ; v1@1021.91,995.8 cw(c1032.04,985.68) 1032.04,1000 cw(c1032.04,1014.32) v1@1021.91,1004.2 ; 1291.02,980.07 1291.09,980 ; v1@1322.8,975.8 ccw(c1312.68,965.68) 1312.68,980 ccw(c1312.68,994.32) v1@1322.8,984.2 ; v1(1327,980) 1291.09,980
AD9: U1.C8 U3.D6 U4.C1 | length 2662.2
  Top Layer w4: v1@398.36,1062.73 cw(c388.23,1052.6) 402.56,1052.6 cw(c416.89,1052.6) v1@406.76,1062.73 ; U4.C1@399.94,1047.9 ccw(c393.61,1054.23) 402.56,1054.23 ccw(c411.51,1054.23) U4.C1@405.18,1047.9 ; U4.C1@402.56,1045.28 v1(402.56,1066.93) ; v1(402.56,1176.18) 419.62,1193.24 843.86,1193.24 ; v1@402.56,1182.12 ccw(c402.56,1196.45) 412.69,1186.32 ccw(c422.83,1176.18) v1@408.5,1176.18 ; U3.D6@829.72,1005.91 982.28,1005.91 v1(995.08,1018.7) ; U3.D6@834.57,1001.06 cw(c846.28,989.35) 846.28,1005.91 cw(c846.28,1022.46) U3.D6@834.57,1010.75 ; 844.76,1194.14 cw(c843.86,1194.14) 843.86,1193.24 ; 975.2,1193.24 cw(c975.2,1171.07) v1@990.88,1186.75 ; 984.86,1193.24 cw(c984.86,1180.72) v1@993.71,1189.58 ; 986.29,1193.24 ccw(c986.29,1199.73) v1@990.88,1195.14 ; v1@989.15,1018.7 cw(c974.82,1018.7) 984.95,1008.57 cw(c995.08,998.44) v1@995.08,1012.77 ; v1@994.92,1193.24 917.66,1193.24 ccw(c917.66,1192.34) 916.76,1192.34 916.76,1184.14 cw(c915.86,1184.14) 915.86,1183.24 908.66,1183.24 cw(c908.66,1184.14) 907.76,1184.14 907.76,1202.34 ccw(c906.86,1202.34) 906.86,1203.24 899.66,1203.24 ccw(c899.66,1202.34) 898.76,1202.34 898.76,1184.14 cw(c897.86,1184.14) 897.86,1183.24 890.66,1183.24 cw(c890.66,1184.14) 889.76,1184.14 889.76,1202.34 ccw(c888.86,1202.34) 888.86,1203.24 881.66,1203.24 ccw(c881.66,1202.34) 880.76,1202.34 880.76,1184.14 cw(c879.86,1184.14) 879.86,1183.24 872.66,1183.24 cw(c872.66,1184.14) 871.76,1184.14 871.76,1202.34 ccw(c870.86,1202.34) 870.86,1203.24 863.66,1203.24 ccw(c863.66,1202.34) 862.76,1202.34 862.76,1184.14 cw(c861.86,1184.14) 861.86,1183.24 854.66,1183.24 cw(c854.66,1184.14) 853.76,1184.14 853.76,1202.34 ccw(c852.86,1202.34) 852.86,1203.24 845.66,1203.24 ccw(c845.66,1202.34) 844.76,1202.34 844.76,1193.24 843.86,1193.24 ; v1@1364.64,1010.01 cw(c1359.11,988.9) U1.C8@1378,999.81 ; v1@1365.65,1013.88 cw(c1362.52,1001.94) 1373.21,1008.11 ; v1@1366.14,1009.82 cw(c1366.14,995.49) 1376.27,1005.62 cw(c1386.4,1015.75) v1@1372.07,1015.75 ; v1(1366.14,1015.75) U1.C8@1385.83,996.06 ; v1@1368.01,1016.24 ccw(c1379.95,1019.37) 1373.78,1008.68 ; v1@1368.11,1010.15 cw(c1369.49,1006.21) 1373.1,1008.3 ; v1@1371.74,1013.78 ccw(c1375.68,1012.4) 1373.59,1008.79 ; v1@1371.88,1017.25 ccw(c1392.99,1022.78) U1.C8@1382.08,1003.89 ; U1.C8@1377.98,996.06 ccw(c1359.05,996.06) 1372.44,1009.45 ccw(c1385.83,1022.84) U1.C8@1385.83,1003.91 ; v1@1367.68,1010.02 cw(c1369.35,1003.78) 1372.58,1009.37 ccw(c1369.35,1003.78) v1@1367.68,1010.02 ; v1@1371.87,1014.21 ccw(c1378.11,1012.54) 1372.52,1009.32 cw(c1378.11,1012.54) v1@1371.87,1014.21
  Bottom Layer w4: v1@398.36,1071.13 ccw(c388.23,1081.26) 402.56,1081.26 ccw(c416.89,1081.26) v1@406.76,1071.13 ; v1@398.36,1171.98 cw(c388.23,1161.85) 402.56,1161.85 cw(c416.89,1161.85) v1@406.76,1171.98 ; v1(402.56,1066.93) v1(402.56,1176.18) v1@402.56,1181.1 ; v1@990.88,1022.9 ccw(c981.14,1032.64) 994.92,1032.64 ; v1@990.88,1186.75 cw(c981.13,1176.99) 994.92,1176.99 ; v1@994.92,1018.7 994.92,1190.79 v1(995.08,1190.94) ; 994.92,1033.4 ccw(c1009.78,1033.4) v1@999.27,1022.9 ; 994.92,1176.23 cw(c1009.79,1176.23) v1@999.28,1186.75 ; 995,1161 1038.5,1161 1038.5,1172.89 cw(c1038.95,1172.89) 1038.95,1173.34 1047.05,1173.34 cw(c1047.05,1172.89) 1047.5,1172.89 1047.5,1146.45 ccw(c1047.95,1146.45) 1047.95,1146 1056.05,1146 ccw(c1056.05,1146.45) 1056.5,1146.45 1056.5,1172.89 cw(c1056.95,1172.89) 1056.95,1173.34 1065.05,1173.34 cw(c1065.05,1172.89) 1065.5,1172.89 1065.5,1146.45 ccw(c1065.95,1146.45) 1065.95,1146 1074.05,1146 ccw(c1074.05,1146.45) 1074.5,1146.45 1074.5,1172.89 cw(c1074.95,1172.89) 1074.95,1173.34 1083.05,1173.34 cw(c1083.05,1172.89) 1083.5,1172.89 1083.5,1146.45 ccw(c1083.95,1146.45) 1083.95,1146 1092.05,1146 ccw(c1092.05,1146.45) 1092.5,1146.45 1092.5,1173.07 cw(c1092.95,1173.07) 1092.95,1173.52 1101.05,1173.52 cw(c1101.05,1173.07) 1101.5,1173.07 1101.5,1146.45 ccw(c1101.95,1146.45) 1101.95,1146 1110.05,1146 ccw(c1110.05,1146.45) 1110.5,1146.45 1110.5,1173.07 cw(c1110.95,1173.07) 1110.95,1173.52 1119.05,1173.52 cw(c1119.05,1173.07) 1119.5,1173.07 1119.5,1146.45 ccw(c1119.95,1146.45) 1119.95,1146 1128.05,1146 ccw(c1128.05,1146.45) 1128.5,1146.45 1128.5,1173.07 cw(c1128.95,1173.07) 1128.95,1173.52 1137.05,1173.52 cw(c1137.05,1173.07) 1137.5,1173.07 1137.5,1146.45 ccw(c1137.95,1146.45) 1137.95,1146 1146.05,1146 ccw(c1146.05,1146.45) 1146.5,1146.45 1146.5,1173.07 cw(c1146.95,1173.07) 1146.95,1173.52 1155.05,1173.52 cw(c1155.05,1173.07) 1155.5,1173.07 1155.5,1146.45 ccw(c1155.95,1146.45) 1155.95,1146 1164.05,1146 ccw(c1164.05,1146.45) 1164.5,1146.45 1164.5,1173.07 cw(c1164.95,1173.07) 1164.95,1173.52 1173.05,1173.52 cw(c1173.05,1173.07) 1173.5,1173.07 1173.5,1146.45 ccw(c1173.95,1146.45) 1173.95,1146 1182.05,1146 ccw(c1182.05,1146.45) 1182.5,1146.45 1182.5,1173.07 cw(c1182.95,1173.07) 1182.95,1173.52 1191.05,1173.52 cw(c1191.05,1173.07) 1191.5,1173.07 1191.5,1146.45 ccw(c1191.95,1146.45) 1191.95,1146 1200.05,1146 ccw(c1200.05,1146.45) 1200.5,1146.45 1200.5,1173.07 cw(c1200.95,1173.07) 1200.95,1173.52 1209.05,1173.52 cw(c1209.05,1173.07) 1209.5,1173.07 1209.5,1161 1243,1161 1255,1149 1255,1034 1261,1028 1353.89,1028 v1(1366.14,1015.75) ; v1@1360.21,1015.75 ccw(c1345.89,1015.75) 1356.01,1025.88 ccw(c1366.14,1036) v1@1366.14,1021.68
AD10: U1.D8 U3.D5 U4.C2 | length 2934.2
  Top Layer w4: v1@387.8,1024.57 cw(c387.8,1010.24) 397.93,1020.38 cw(c408.07,1030.51) v1@393.73,1030.51 ; v1(387.8,1030.51) U4.C2@402.56,1015.75 ; v1@396.18,1207.84 cw(c406.87,1197.15) 406.87,1212.27 ; v1@397.64,1212.27 795.21,1212.27 ccw(c795.21,1213.17) 796.11,1213.17 796.11,1221.37 cw(c797.01,1221.37) 797.01,1222.27 804.21,1222.27 cw(c804.21,1221.37) 805.11,1221.37 805.11,1203.17 ccw(c806.01,1203.17) 806.01,1202.27 813.21,1202.27 ccw(c813.21,1203.17) 814.11,1203.17 814.11,1221.37 cw(c815.01,1221.37) 815.01,1222.27 822.21,1222.27 cw(c822.21,1221.37) 823.11,1221.37 823.11,1203.17 ccw(c824.01,1203.17) 824.01,1202.27 831.21,1202.27 ccw(c831.21,1203.17) 832.11,1203.17 832.11,1211.37 cw(c833.01,1211.37) 833.01,1212.27 v1(967.52,1212.27) v1(1101,1212.27) ; U4.C2@398.85,1015.75 ccw(c389.9,1015.75) 396.23,1022.08 ccw(c402.56,1028.41) U4.C2@402.56,1019.46 ; v1@399.01,1205.01 cw(c416.53,1187.49) 416.53,1212.27 ; v1@401.84,1202.18 cw(c426.19,1177.83) 426.19,1212.27 ; U3.D5@798.23,1005.91 813.98,1021.65 v1(958.66,1021.65) ; U3.D5@798.23,1012.76 ccw(c798.23,1029.32) 809.94,1017.61 ccw(c821.64,1005.91) U3.D5@805.09,1005.91 ; v1@954.47,1017.46 ccw(c944.34,1007.33) 944.34,1021.65 ccw(c944.34,1035.98) v1@954.47,1025.85 ; v1@963.32,1208.07 ccw(c953.19,1197.94) 953.19,1212.27 ccw(c953.19,1226.6) v1@963.32,1216.47 ; v1@971.72,1208.07 cw(c981.85,1197.94) 981.85,1212.27 cw(c981.85,1226.6) v1@971.72,1216.47 ; 1086.67,1212.27 ccw(c1086.67,1226.61) v1@1096.8,1216.47 ; 1086.69,1212.27 cw(c1086.69,1197.96) v1@1096.8,1208.08 ; v1@1404.01,1010.01 cw(c1398.48,988.9) U1.D8@1417.37,999.81 ; v1@1405.02,1013.88 cw(c1401.89,1001.94) 1412.58,1008.11 ; v1@1405.51,1009.82 cw(c1405.51,995.49) 1415.64,1005.62 cw(c1425.77,1015.75) v1@1411.44,1015.75 ; v1(1405.51,1015.75) U1.D8@1425.2,996.06 ; v1@1407.38,1016.24 ccw(c1419.32,1019.37) 1413.15,1008.68 ; v1@1407.48,1010.15 cw(c1408.86,1006.21) 1412.47,1008.3 ; v1@1411.11,1013.78 ccw(c1415.05,1012.4) 1412.96,1008.79 ; v1@1411.25,1017.25 ccw(c1432.36,1022.78) U1.D8@1421.45,1003.89 ; U1.D8@1417.35,996.06 ccw(c1398.42,996.06) 1411.81,1009.45 ccw(c1425.2,1022.84) U1.D8@1425.2,1003.91 ; v1@1407.05,1010.02 cw(c1408.72,1003.78) 1411.95,1009.37 ccw(c1408.72,1003.78) v1@1407.05,1010.02 ; v1@1411.24,1014.21 ccw(c1417.48,1012.54) 1411.89,1009.31 cw(c1417.48,1012.54) v1@1411.24,1014.21
  Bottom Layer w4: v1@383.6,1034.71 ccw(c375.09,1043.22) 387.12,1043.22 ; 387.12,1046.47 ccw(c403.75,1046.47) v1@391.99,1034.71 ; v1(387.8,1030.51) 387.12,1031.18 387.12,1195.87 v1(397.64,1206.38) ; v1@391.7,1206.38 cw(c377.37,1206.38) 387.5,1196.25 cw(c397.64,1186.11) v1@397.64,1200.44 ; v1(958.66,1021.65) 967.52,1030.51 ; v1@959.25,1027.56 ccw(c960.27,1037.77) 967.52,1030.51 ; v1@963.32,1208.07 cw(c953.19,1197.94) 967.52,1197.94 cw(c981.85,1197.94) v1@971.72,1208.07 ; v1@964.57,1022.24 cw(c974.77,1023.26) 967.52,1030.51 ; v1(967.52,1212.27) 967.52,1030.51 ; v1(1101,1212.27) 1118.5,1212.27 1118.5,1226.82 cw(c1118.95,1226.82) 1118.95,1227.27 1127.05,1227.27 cw(c1127.05,1226.82) 1127.5,1226.82 1127.5,1197.72 ccw(c1127.95,1197.72) 1127.95,1197.27 1136.05,1197.27 ccw(c1136.05,1197.72) 1136.5,1197.72 1136.5,1226.82 cw(c1136.95,1226.82) 1136.95,1227.27 1145.05,1227.27 cw(c1145.05,1226.82) 1145.5,1226.82 1145.5,1197.72 ccw(c1145.95,1197.72) 1145.95,1197.27 1154.05,1197.27 ccw(c1154.05,1197.72) 1154.5,1197.72 1154.5,1226.82 cw(c1154.95,1226.82) 1154.95,1227.27 1163.05,1227.27 cw(c1163.05,1226.82) 1163.5,1226.82 1163.5,1197.72 ccw(c1163.95,1197.72) 1163.95,1197.27 1172.05,1197.27 ccw(c1172.05,1197.72) 1172.5,1197.72 1172.5,1226.82 cw(c1172.95,1226.82) 1172.95,1227.27 1181.05,1227.27 cw(c1181.05,1226.82) 1181.5,1226.82 1181.5,1197.72 ccw(c1181.95,1197.72) 1181.95,1197.27 1190.05,1197.27 ccw(c1190.05,1197.72) 1190.5,1197.72 1190.5,1226.82 cw(c1190.95,1226.82) 1190.95,1227.27 1199.05,1227.27 cw(c1199.05,1226.82) 1199.5,1226.82 1199.5,1197.72 ccw(c1199.95,1197.72) 1199.95,1197.27 1208.05,1197.27 ccw(c1208.05,1197.72) 1208.5,1197.72 1208.5,1226.82 cw(c1208.95,1226.82) 1208.95,1227.27 1217.05,1227.27 cw(c1217.05,1226.82) 1217.5,1226.82 1217.5,1197.72 ccw(c1217.95,1197.72) 1217.95,1197.27 1226.05,1197.27 ccw(c1226.05,1197.72) 1226.5,1197.72 1226.5,1226.82 cw(c1226.95,1226.82) 1226.95,1227.27 1235.05,1227.27 cw(c1235.05,1226.82) 1235.5,1226.82 1235.5,1197.72 ccw(c1235.95,1197.72) 1235.95,1197.27 1244.05,1197.27 ccw(c1244.05,1197.72) 1244.5,1197.72 1244.5,1226.82 cw(c1244.95,1226.82) 1244.95,1227.27 1253.05,1227.27 cw(c1253.05,1226.82) 1253.5,1226.82 1253.5,1197.72 ccw(c1253.95,1197.72) 1253.95,1197.27 1262.05,1197.27 ccw(c1262.05,1197.72) 1262.5,1197.72 1262.5,1226.82 cw(c1262.95,1226.82) 1262.95,1227.27 1271.05,1227.27 cw(c1271.05,1226.82) 1271.5,1226.82 1271.5,1197.72 ccw(c1271.95,1197.72) 1271.95,1197.27 1280.05,1197.27 ccw(c1280.05,1197.72) 1280.5,1197.72 1280.5,1226.82 cw(c1280.95,1226.82) 1280.95,1227.27 1289.05,1227.27 cw(c1289.05,1226.82) 1289.5,1226.82 1289.5,1197.72 ccw(c1289.95,1197.72) 1289.95,1197.27 1298.05,1197.27 ccw(c1298.05,1197.72) 1298.5,1197.72 1298.5,1226.82 cw(c1298.95,1226.82) 1298.95,1227.27 1307.05,1227.27 cw(c1307.05,1226.82) 1307.5,1226.82 1307.5,1212.27 1339.73,1212.27 1342,1210 1342,1079.26 v1(1405.51,1015.75) ; v1@1105.2,1208.08 cw(c1115.32,1197.95) 1115.32,1212.27 cw(c1115.32,1226.6) v1@1105.2,1216.47 ; v1@1399.58,1015.75 ccw(c1385.26,1015.75) 1395.38,1025.88 ccw(c1405.51,1036) v1@1405.51,1021.68
AD11: U1.A9 U3.C6 U4.D2 | length 2739.9
  Top Layer w4: v1@358.27,1024.57 cw(c358.27,1010.24) 368.4,1020.38 cw(c378.54,1030.51) v1@364.2,1030.51 ; v1(358.27,1030.51) U4.D2@373.03,1015.75 ; v1(358.27,1207.68) 381.89,1231.3 710.9,1231.3 710.9,1240.4 cw(c711.8,1240.4) 711.8,1241.3 719,1241.3 cw(c719,1240.4) 719.9,1240.4 719.9,1222.2 ccw(c720.8,1222.2) 720.8,1221.3 728,1221.3 ccw(c728,1222.2) 728.9,1222.2 728.9,1240.4 cw(c729.8,1240.4) 729.8,1241.3 737,1241.3 cw(c737,1240.4) 737.9,1240.4 737.9,1222.2 ccw(c738.8,1222.2) 738.8,1221.3 746,1221.3 ccw(c746,1222.2) 746.9,1222.2 746.9,1240.4 cw(c747.8,1240.4) 747.8,1241.3 755,1241.3 cw(c755,1240.4) 755.9,1240.4 755.9,1222.2 ccw(c756.8,1222.2) 756.8,1221.3 764,1221.3 ccw(c764,1222.2) 764.9,1222.2 764.9,1240.4 cw(c765.8,1240.4) 765.8,1241.3 773,1241.3 cw(c773,1240.4) 773.9,1240.4 773.9,1222.2 ccw(c774.8,1222.2) 774.8,1221.3 782,1221.3 ccw(c782,1222.2) 782.9,1222.2 782.9,1230.4 cw(c783.8,1230.4) 783.8,1231.3 v1(939.96,1231.3) ; v1@358.27,1213.61 ccw(c358.27,1227.93) 368.4,1217.81 ccw(c378.52,1207.68) v1@364.2,1207.68 ; U4.D2@369.32,1015.75 ccw(c360.37,1015.75) 366.7,1022.08 ccw(c373.03,1028.41) U4.D2@373.03,1019.46 ; U3.C6@829.72,1037.4 830.71,1038.39 v1(930.12,1038.39) ; U3.C6@831.75,1035.38 cw(c839,1028.13) 839,1038.39 ; U3.C6@834.57,1032.55 cw(c848.66,1018.47) 848.66,1038.39 ; U3.C6@834.57,1042.25 ccw(c843.91,1051.58) 843.91,1038.39 ; v1@925.92,1034.19 ccw(c915.78,1024.05) 915.78,1038.39 ccw(c915.78,1052.72) v1@925.92,1042.58 ; v1@935.76,1227.1 ccw(c925.63,1216.97) 925.63,1231.3 ccw(c925.63,1245.63) v1@935.76,1235.5 ; v1@1273.54,1040.54 ccw(c1285.86,1052.86) 1285.86,1035.43 ; v1(1275,1042) 1281.57,1035.43 ; v1@1276.37,1043.37 ccw(c1295.52,1062.52) 1295.52,1035.43 ; v1@1277.04,1036.43 cw(c1278.53,1032.39) 1281.57,1035.43 ; v1@1279.2,1046.2 ccw(c1305.18,1072.18) U1.A9@1305.18,1035.43 ; v1@1280.57,1039.96 ccw(c1284.61,1038.47) 1281.57,1035.43 ; U1.A9@1301.54,1029.89 ccw(c1288.15,1016.5) 1288.15,1035.43 ccw(c1288.15,1054.37) U1.A9@1301.54,1040.98 ; U1.A9@1307.09,1035.43 1281.57,1035.43
  Bottom Layer w4: v1@354.07,1034.71 ccw(c343.93,1044.85) 358.27,1044.85 ccw(c372.6,1044.85) v1@362.47,1034.71 ; v1@354.07,1203.48 cw(c343.94,1193.35) 358.27,1193.35 cw(c372.59,1193.35) v1@362.46,1203.48 ; v1(358.27,1030.51) v1(358.27,1207.68) ; v1(930.12,1038.39) 939.96,1048.23 ; v1@930.24,1044.32 ccw(c930.52,1057.67) 939.96,1048.23 ; v1@935.76,1227.1 cw(c925.63,1216.97) 939.96,1216.97 cw(c954.29,1216.97) 944.16,1227.1 cw(c954.29,1216.97) 954.29,1231.3 cw(c954.29,1245.63) v1@944.16,1235.5 ; v1@936.05,1038.51 cw(c949.4,1038.79) 939.96,1048.23 ; v1@1270.8,1046.2 ccw(c1260.68,1056.32) 1275,1056.32 ccw(c1289.32,1056.32) v1@1279.2,1046.2 ; v1(1275,1042) 1275,1063.5 1288,1076.5 1313,1076.5 1313,1085.5 1263,1085.5 1263,1094.5 1312.84,1094.5 1312.84,1103.5 1263,1103.5 1263,1112.5 1313,1112.5 1313,1121.5 1263,1121.5 1263,1130.5 1313,1130.5 1313,1139.5 1263,1139.5 1263,1148.5 1313,1148.5 1313,1157.5 1263,1157.5 1263,1166.5 1313,1166.5 1313,1175.5 1288,1175.5 1288,1180 1286.48,1181.52 1034.48,1181.52 1032.48,1183.52 1032.48,1228.52 1029.7,1231.3 v1(939.96,1231.3) 939.96,1048.23
AD12: U1.A12 U3.C5 U4.E2 | length 2709.9
  Top Layer w4: v1@324.54,1080.45 cw(c314.42,1070.32) 328.74,1070.32 cw(c343.06,1070.32) v1@332.94,1080.45 ; v1@328.74,1081.69 328.74,1030.51 U4.E2@343.5,1015.75 ; v1(334.65,1250.33) 649.4,1250.33 cw(c649.4,1249.43) 650.3,1249.43 650.3,1241.23 ccw(c651.2,1241.23) 651.2,1240.33 658.4,1240.33 ccw(c658.4,1241.23) 659.3,1241.23 659.3,1259.43 cw(c660.2,1259.43) 660.2,1260.33 667.4,1260.33 cw(c667.4,1259.43) 668.3,1259.43 668.3,1241.23 ccw(c669.2,1241.23) 669.2,1240.33 676.4,1240.33 ccw(c676.4,1241.23) 677.3,1241.23 677.3,1259.43 cw(c678.2,1259.43) 678.2,1260.33 685.4,1260.33 cw(c685.4,1259.43) 686.3,1259.43 686.3,1241.23 ccw(c687.2,1241.23) 687.2,1240.33 694.4,1240.33 ccw(c694.4,1241.23) 695.3,1241.23 695.3,1249.43 cw(c696.2,1249.43) 696.2,1250.33 v1(912.4,1250.33) 1047.5,1250.33 1047.5,1260.91 cw(c1047.95,1260.91) 1047.95,1261.36 1056.05,1261.36 cw(c1056.05,1260.91) 1056.5,1260.91 1056.5,1235.78 ccw(c1056.95,1235.78) 1056.95,1235.33 1065.05,1235.33 ccw(c1065.05,1235.78) 1065.5,1235.78 1065.5,1260.91 cw(c1065.95,1260.91) 1065.95,1261.36 1074.05,1261.36 cw(c1074.05,1260.91) 1074.5,1260.91 1074.5,1235.78 ccw(c1074.95,1235.78) 1074.95,1235.33 1083.05,1235.33 ccw(c1083.05,1235.78) 1083.5,1235.78 1083.5,1260.91 cw(c1083.95,1260.91) 1083.95,1261.36 1092.05,1261.36 cw(c1092.05,1260.91) 1092.5,1260.91 1092.5,1235.78 ccw(c1092.95,1235.78) 1092.95,1235.33 1101.05,1235.33 ccw(c1101.05,1235.78) 1101.5,1235.78 1101.5,1260.91 cw(c1101.95,1260.91) 1101.95,1261.36 1110.05,1261.36 cw(c1110.05,1260.91) 1110.5,1260.91 1110.5,1235.78 ccw(c1110.95,1235.78) 1110.95,1235.33 1119.05,1235.33 ccw(c1119.05,1235.78) 1119.5,1235.78 1119.5,1260.91 cw(c1119.95,1260.91) 1119.95,1261.36 1128.05,1261.36 cw(c1128.05,1260.91) 1128.5,1260.91 1128.5,1235.78 ccw(c1128.95,1235.78) 1128.95,1235.33 1137.05,1235.33 ccw(c1137.05,1235.78) 1137.5,1235.78 1137.5,1260.91 cw(c1137.95,1260.91) 1137.95,1261.36 1146.05,1261.36 cw(c1146.05,1260.91) 1146.5,1260.91 1146.5,1235.78 ccw(c1146.95,1235.78) 1146.95,1235.33 1155.05,1235.33 ccw(c1155.05,1235.78) 1155.5,1235.78 1155.5,1260.91 cw(c1155.95,1260.91) 1155.95,1261.36 1164.05,1261.36 cw(c1164.05,1260.91) 1164.5,1260.91 1164.5,1235.78 ccw(c1164.95,1235.78) 1164.95,1235.33 1173.05,1235.33 ccw(c1173.05,1235.78) 1173.5,1235.78 1173.5,1260.91 cw(c1173.95,1260.91) 1173.95,1261.36 1182.05,1261.36 cw(c1182.05,1260.91) 1182.5,1260.91 1182.5,1235.78 ccw(c1182.95,1235.78) 1182.95,1235.33 1191.05,1235.33 ccw(c1191.05,1235.78) 1191.5,1235.78 1191.5,1260.91 cw(c1191.95,1260.91) 1191.95,1261.36 1200.05,1261.36 cw(c1200.05,1260.91) 1200.5,1260.91 1200.5,1235.78 ccw(c1200.95,1235.78) 1200.95,1235.33 1209.05,1235.33 ccw(c1209.05,1235.78) 1209.5,1235.78 1209.5,1260.91 cw(c1209.95,1260.91) 1209.95,1261.36 1218.05,1261.36 cw(c1218.05,1260.91) 1218.5,1260.91 1218.5,1235.78 ccw(c1218.95,1235.78) 1218.95,1235.33 1227.05,1235.33 ccw(c1227.05,1235.78) 1227.5,1235.78 1227.5,1260.91 cw(c1227.95,1260.91) 1227.95,1261.36 1236.05,1261.36 cw(c1236.05,1260.91) 1236.5,1260.91 1236.5,1235.78 ccw(c1236.95,1235.78) 1236.95,1235.33 1245.05,1235.33 ccw(c1245.05,1235.78) 1245.5,1235.78 1245.5,1260.91 cw(c1245.95,1260.91) 1245.95,1261.36 1254.05,1261.36 cw(c1254.05,1260.91) 1254.5,1260.91 1254.5,1235.78 ccw(c1254.95,1235.78) 1254.95,1235.33 1263.05,1235.33 ccw(c1263.05,1235.78) 1263.5,1235.78 1263.5,1260.91 cw(c1263.95,1260.91) 1263.95,1261.36 1272.05,1261.36 cw(c1272.05,1260.91) 1272.5,1260.91 1272.5,1235.78 ccw(c1272.95,1235.78) 1272.95,1235.33 1281.05,1235.33 ccw(c1281.05,1235.78) 1281.5,1235.78 1281.5,1260.91 cw(c1281.95,1260.91) 1281.95,1261.36 1290.05,1261.36 cw(c1290.05,1260.91) 1290.5,1260.91 1290.5,1235.78 ccw(c1290.95,1235.78) 1290.95,1235.33 1299.05,1235.33 ccw(c1299.05,1235.78) 1299.5,1235.78 1299.5,1250.33 1305.67,1250.33 1307.09,1248.91 U1.A12@1307.09,1153.54 ; v1@338.84,1246.13 cw(c348.98,1235.99) 348.98,1250.33 cw(c348.98,1264.66) v1@338.84,1254.53 ; U4.E2@339.8,1015.75 ccw(c330.84,1015.75) 337.17,1022.08 ccw(c343.5,1028.41) U4.E2@343.5,1019.46 ; U3.C5@798.23,1037.4 813.98,1053.15 v1(904.53,1053.15) ; U3.C5@798.23,1044.26 ccw(c798.23,1060.82) 809.94,1049.11 ccw(c821.64,1037.4) U3.C5@805.09,1037.4 ; v1@900.33,1048.95 ccw(c890.2,1038.83) 890.2,1053.15 ccw(c890.2,1067.47) v1@900.33,1057.34 ; v1@908.2,1246.13 ccw(c898.07,1235.99) 898.07,1250.33 ccw(c898.07,1264.66) v1@908.2,1254.53 ; v1@916.6,1246.13 cw(c926.73,1235.99) 926.73,1250.33 ; U1.A12@1301.54,1159.09 ccw(c1288.15,1172.48) 1307.09,1172.48 ccw(c1326.02,1172.48) U1.A12@1312.63,1159.09
  Bottom Layer w4: v1@324.54,1088.84 ccw(c314.42,1098.97) 328.74,1098.97 ccw(c343.06,1098.97) v1@332.94,1088.84 ; v1(328.74,1084.65) 328.74,1244.42 v1(334.65,1250.33) ; 328.74,1221.74 cw(c363.24,1221.74) v1@338.84,1246.13 ; 328.74,1231.39 cw(c353.58,1231.39) v1@336.02,1248.96 ; 328.74,1241.05 cw(c343.92,1241.05) v1@333.19,1251.79 ; v1(904.53,1053.15) 912.4,1061.02 v1(912.4,1250.33) ; v1@908.2,1246.13 cw(c898.07,1235.99) 912.4,1235.99 cw(c926.73,1235.99) v1@916.6,1246.13